# Altium PCB MAGIsDebugger-JLink.PcbDoc
Units mil, origin at the board's own origin, x right, y up, seen from the top; angles counter-clockwise.
Board outline 6000 x 4000 mil, 2 copper layers (Top Layer, Bottom Layer); 33 components, 29 nets, 171 pads, 36 vias.
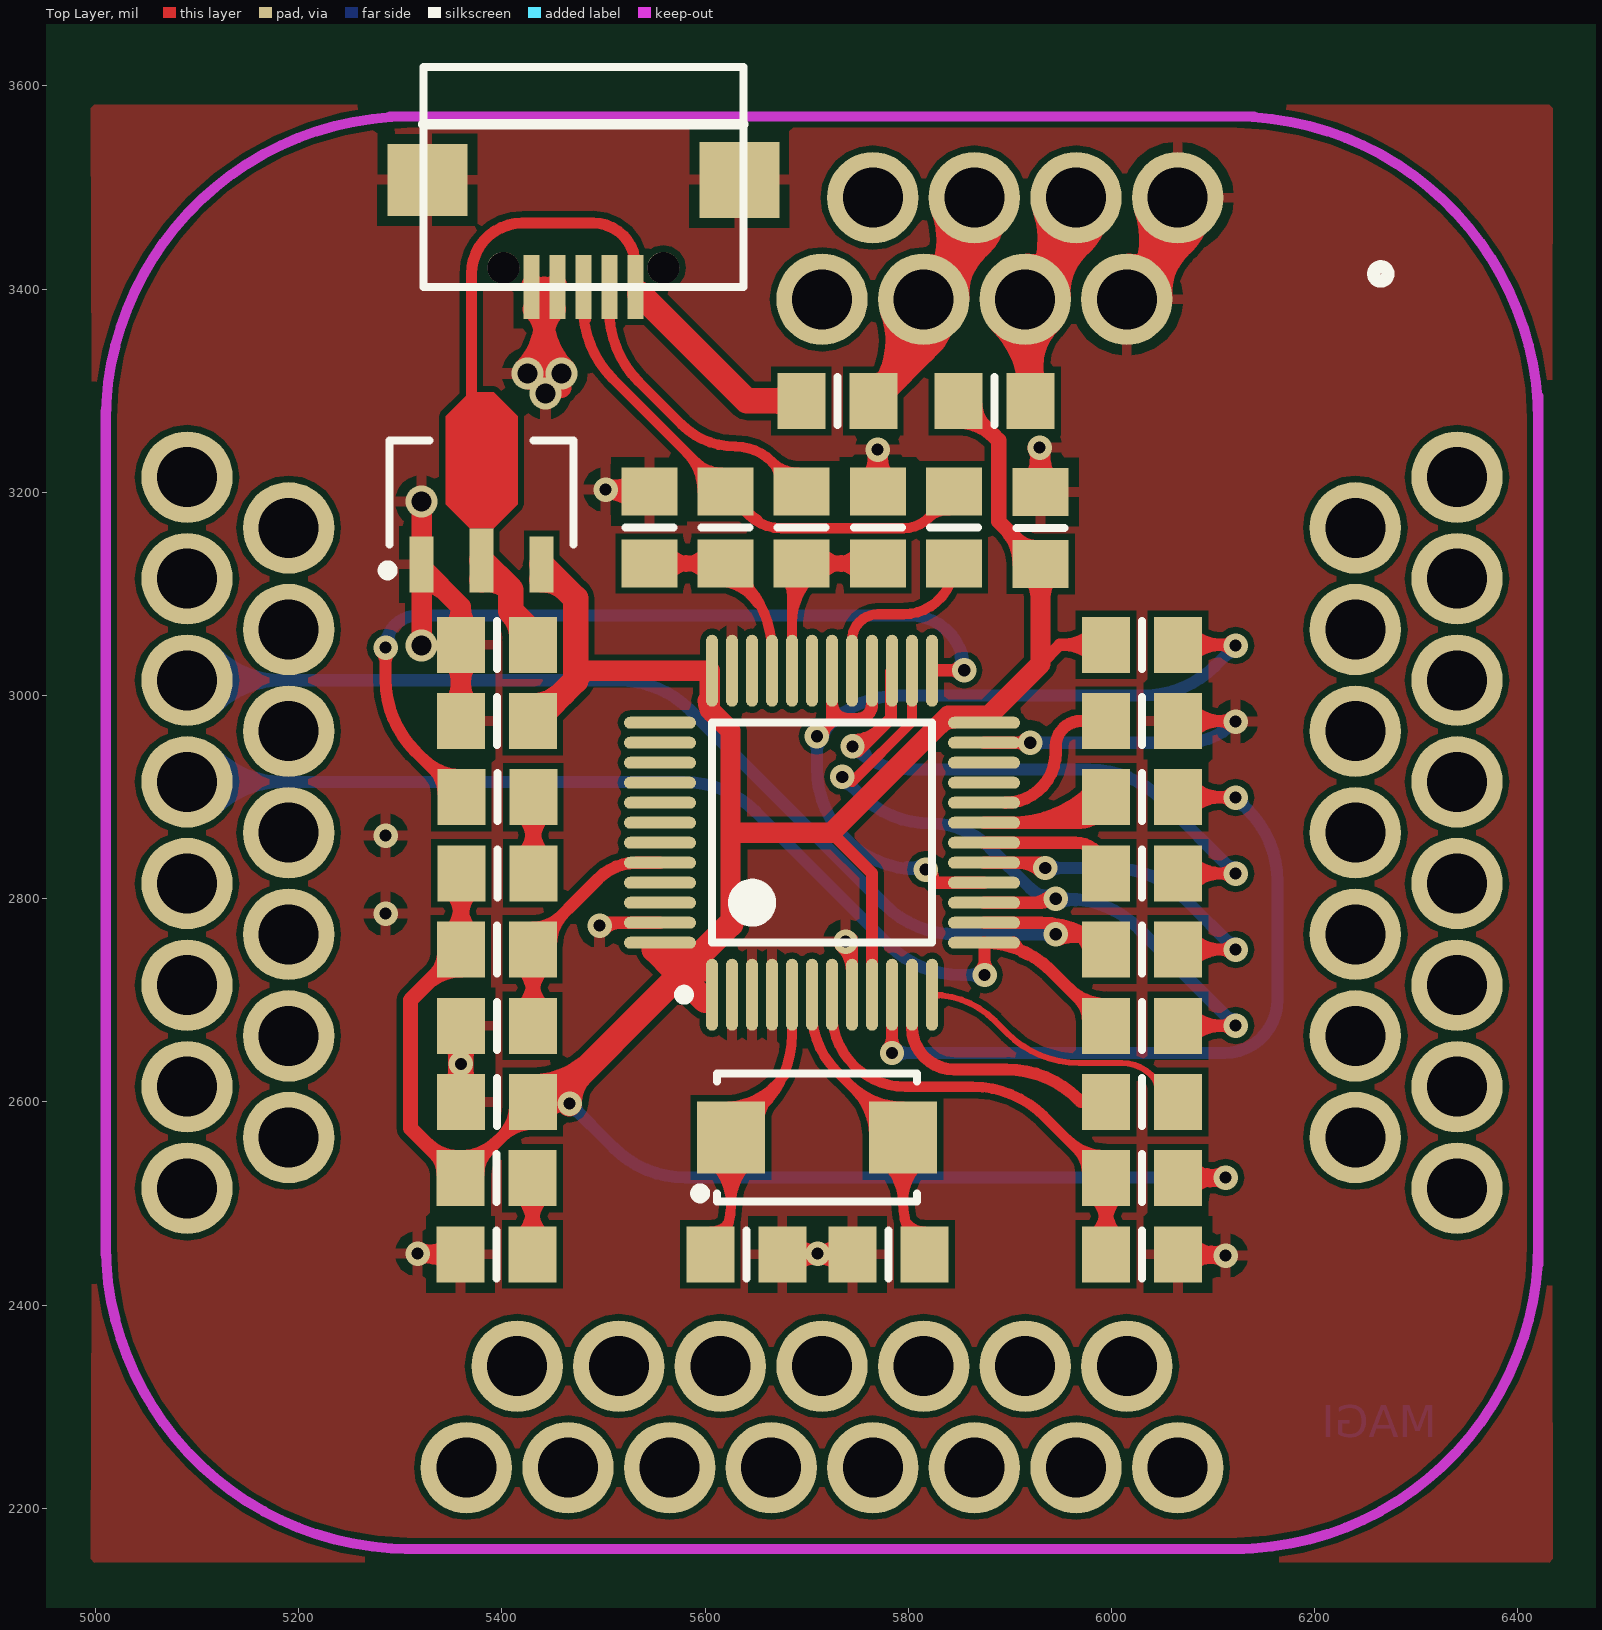
[diagram p0: Top Layer view]
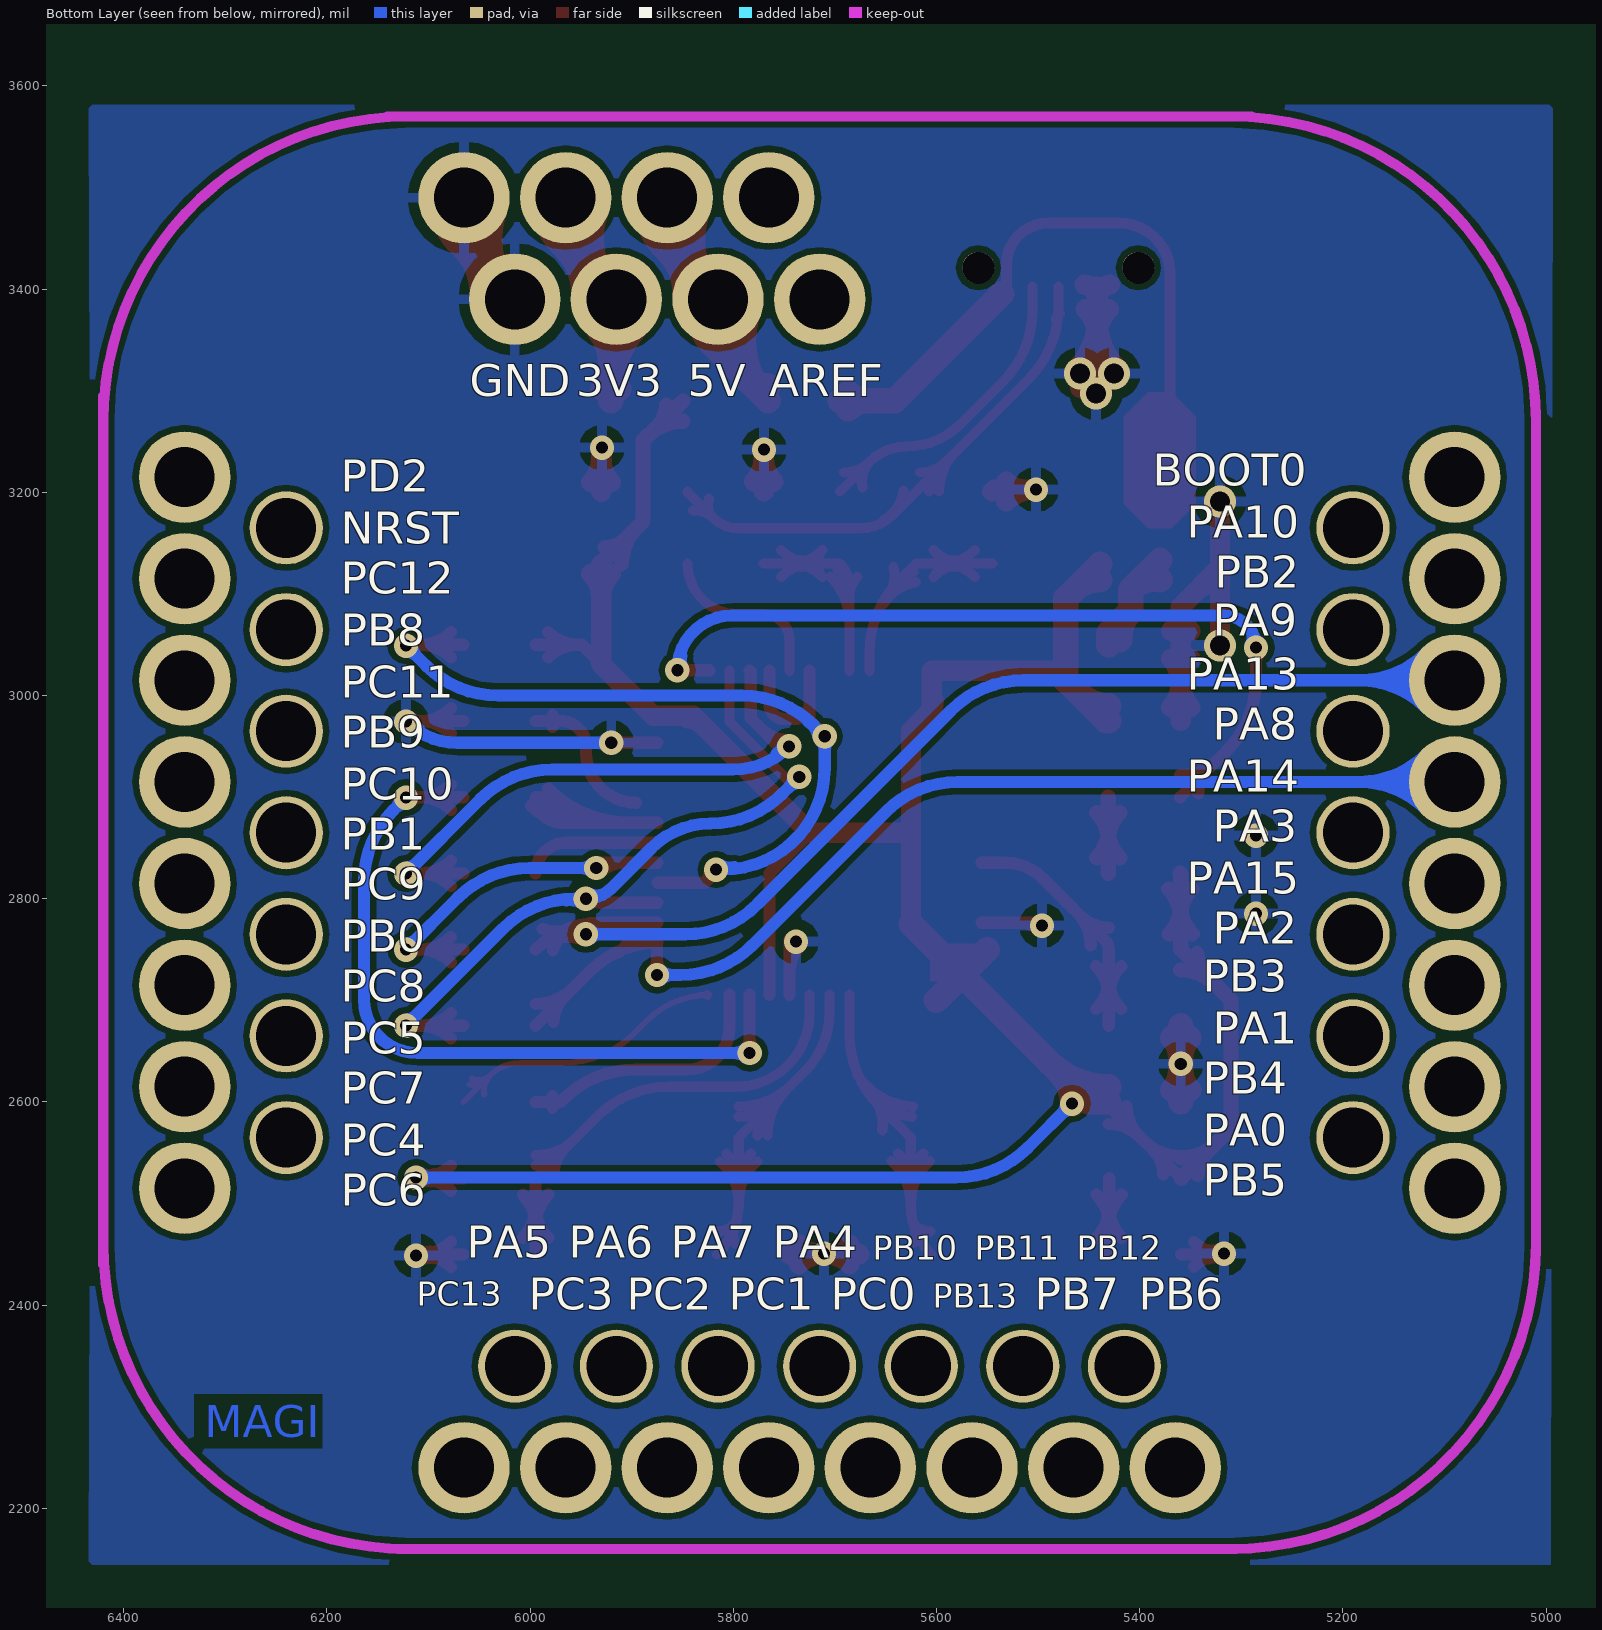
[diagram p1: Bottom Layer view, seen from below]

## Layer stack, top to bottom
Top Solder: solder mask 0.4, Solder Resist, Dk 3.5
Top Layer: signal copper 1.4
Dielectric 1: dielectric 12.6, FR-4, Dk 4.8
Bottom Layer: signal copper 1.4
Bottom Solder: solder mask 0.4, Solder Resist, Dk 3.5

## Board outline
1000,1000 7000,1000 7000,5000 1000,5000

## Design rules (kind name [scope] priority, off if disabled: settings)
Clearance [All] p1: gap=6
PolygonConnect [All] p1: connectstyle=Relief reliefconductorwidth=10 reliefentries=4 polygonreliefangle="90 Angle" airgapwidth=10
RoutingVias [All] p1: holewidth=28 width=50 viastyle="Through Hole" minholewidth=28 minwidth=50 maxholewidth=28 maxwidth=50
SolderMaskExpansion [All] p1: expansion=4
Width [All] p1: maxlimit=100 minlimit=6 preferedwidth=20
29 further rules are at their usual default settings.

## Components (designator, comment, footprint, x,y, rotation, side; value= is the part's Value field where it differs from the comment)
C1 "10uf" 6-0805_n 5395,3050 r180 top
C2 "15PF" 6-0805_n 5770,3165.43 r270 top
C3 "15PF" 6-0805_n 5545,3165.43 r270 top
C4 "10uf" 6-0805_n 5395,2975 r180 top
C5 "10uf" 6-0805_n 5930,3165 r90 top
C6 "10uf" 6-0805_N 5395,2600 r180 top
C7 "15PF" 6-0805_n 5640.43,2450 r180 top
C8 "15PF" 6-0805_n 5780.43,2450 r0 top
C9 "104" 6-0805_n 6030,2450 r180 top
J1 "MAGIsBoard-2x" MAGIsBoard-2x 5715,2865 r0 top
LED1 "LED_3" 6-0805_n 5395.43,2825 r0 top
LED2 "LED_3" 6-0805_n 5394.57,2450 r180 top
R1 "100" 6-0805_N 6030,2900 r0 top
R2 "100" 6-0805_N 6030,2825 r0 top
R3 "100" 6-0805_N 6030,2750 r0 top
R4 "100" 6-0805_N 6030,2675 r0 top
R5 "10K" 6-0805_n 5845,3165.43 r270 top
R6 "100" 6-0805_N 6030,2600 r180 top
R7 "10K" 6-0805_n 5695,3165.43 r270 top
R8 "10K" 6-0805_n 5620,3165.43 r270 top
R9 "10k" 6-0805_N 6030,3050 r180 top
R10 "0" 6-0805_n 5730,3290 r0 top
R11 "0" 6-0805_n 5885,3290 r0 top
R12 "10K" 6-0805_n 6030,2525 r0 top
R13 "10K" 6-0805_n 5395,2750 r180 top
R14 "10K" 6-0805_n 5395,2675 r0 top
R15 "10K" 6-0805_n 6030,2975 r180 top
R16 "RES1_1" 6-0805_n 5395.43,2900 r180 top
R17 "RES1_1" 6-0805_n 5394.57,2525 r180 top
U1 "USB" microUSB 5480,3425 r0 top
U2 "STM32F103CBT6" LQFP48_N 5715,2865 r90 top
U3 "HS7333" HS7333 5380,3200 r90 top
X1 "8M" 5032 5720,2565 r270 top

## Footprints (in the part's own frame and the unit in brackets; to place one, negate y for a bottom-side part, rotate by r counter-clockwise, add the part's x,y. Pads: shape width x height; smd on the part's side, far side on the other; paste and mask are expansions set on the pad)
6-0805_n [mm] "Chip Resistor, Body 2.0x1.2mm, IPC Medium Density"
  rect 1.2x1.4 smd: 1(-0.9,0) 2(0.9,0)
  silkscreen extent 0,-0.6 0,0.6, body extent -1.07,-0.7 1.07,0.7, height 0.7
6-0805_N [mm] "Chip Resistor, Body 2.0x1.2mm, IPC Medium Density"
  rect 1.2x1.4 smd: 1(-0.9,0) 2(0.9,0)
  silkscreen extent 0,-0.6 0,0.6, body extent -1.07,-0.7 1.07,0.7, height 0.7
5032 [mm]
  rect 1.8x1.7 smd: 1(0,-2.404) 2(0,1.896)
  silkscreen extent -1.6,-3.3 1.6,2.25
HS7333 [mm] "SOT89, 3-Leads, Body 4.50x2.50mm, Pitch 1.50mm, Lead Span 4.1mm, IPC Medium Density"
  rect 1.4x0.6 smd: 1(-1.8,1.5) 3(-1.8,-1.5)
  rect 1.6x0.6 smd: 2(-1.7,0)
  Top Layer region: -0.9,0.3 -0.3,0.9 1.9,0.9 2.5,0.3 2.5,-0.3 1.9,-0.9 -0.3,-0.9 -0.9,-0.3
  silkscreen extent -2.07,-2.3 1.3,2.47, body extent -1.3,-2.3 1.3,2.3, height 1.6
LQFP48_N [mm] "Thin QFP, 48-Leads, Body 7x7mm, Pitch 0.5mm, IPC Medium Density"
  oval 1.8x0.3 smd: 1(-4.05,2.75) 2(-4.05,2.25) 3(-4.05,1.75) 4(-4.05,1.25) 5(-4.05,0.75) 6(-4.05,0.25) 7(-4.05,-0.25) 8(-4.05,-0.75) 9(-4.05,-1.25) 10(-4.05,-1.75) 11(-4.05,-2.25) 12(-4.05,-2.75) 25(4.05,-2.75) 26(4.05,-2.25) 27(4.05,-1.75) 28(4.05,-1.25) 29(4.05,-0.75) 30(4.05,-0.25) 31(4.05,0.25) 32(4.05,0.75) 33(4.05,1.25) 34(4.05,1.75) 35(4.05,2.25) 36(4.05,2.75)
  oval 0.3x1.8 smd: 13(-2.75,-4.05) 14(-2.25,-4.05) 15(-1.75,-4.05) 16(-1.25,-4.05) 17(-0.75,-4.05) 18(-0.25,-4.05) 19(0.25,-4.05) 20(0.75,-4.05) 21(1.25,-4.05) 22(1.75,-4.05) 23(2.25,-4.05) 24(2.75,-4.05) 37(2.75,4.05) 38(2.25,4.05) 39(1.75,4.05) 40(1.25,4.05) 41(0.75,4.05) 42(0.25,4.05) 43(-0.25,4.05) 44(-0.75,4.05) 45(-1.25,4.05) 46(-1.75,4.05) 47(-2.25,4.05) 48(-2.75,4.05)
  silkscreen extent -4.17,-2.75 2.75,3.57, body extent -3.5,-3.5 3.5,3.5, height 1.6
MAGIsBoard-2x [mil]
  round 90 hole 59.06: 1(300,525) 1(350,625) 2(200,525) 2(250,625) 3(100,525) 3(150,625) 4(0,525) 4(50,625) 29(-625,350) 30(-625,250) 31(-625,150) 32(-625,50) 33(-625,-50) 34(-625,-150) 35(-625,-250) 36(-625,-350) 37(-350,-625) 38(-250,-625) 39(-150,-625) 40(-50,-625) 41(50,-625) 42(150,-625) 43(250,-625) 44(350,-625) 45(625,-350) 46(625,-250) 47(625,-150) 48(625,-50) 49(625,50) 50(625,150) 51(625,250) 52(625,350)
  round 90 / inner round 72 / far side round 72 hole 59.06: 8(-525,300) 9(-525,200) 10(-525,100) 11(-525,0) 12(-525,-100) 13(-525,-200) 14(-525,-300) 15(-300,-525) 16(-200,-525) 17(-100,-525) 18(0,-525) 19(100,-525) 20(200,-525) 21(300,-525) 22(525,-300) 23(525,-200) 24(525,-100) 25(525,0) 26(525,100) 27(525,200) 28(525,300)
  Keep-Out Layer lines w10: -705,-415 -705,415 ; -705,-405 ccw(c-405,-405) -405,-705 ; -705,405 cw(c-405,405) -405,705 ; -425,705 425,705 ; -410,-705 415,-705 ; 405,-705 ccw(c405,-405) 705,-405 ; 405,705 cw(c405,405) 705,405 ; 705,-425 705,430
  silkscreen extent 543,543 557,557
microUSB [mm]
  round 0.8 hole 0.8: 0(-2,-0.1) 0(2,-0.1)
  rect 0.4x1.6 smd: 1(1.3,-0.576) 2(0.65,-0.576) 3(0,-0.576) 4(-0.65,-0.576) 5(-1.3,-0.576)
  rect 2x1.8 smd: 6(-3.9,2.1)
  rect 2x1.9 smd: 7(3.9,2.1)
  silkscreen extent -4,-0.58 4,4.92, body extent -4.1,-0.68 4.1,5.02, height 3

## Part data
C1 C4 C5 C6: library part "CAPACITOR POL", "Capacitor"
C2 C3 C7 C8 C9: library part CAP
R1 R2 R3 R4 R6 R9: library part RESISTOR/SM
R5 R7 R8 R10 R11 R12 R13 R14 R15: library part RES
U2: "STM32 ARM-based 32-bit MCU with 128 Kbytes Flash, 48-pin LQFP, Industrial Temperature"
X1: library part CRYSTAL

## Via types
v1: diameter 24, hole 12, Top Layer to Bottom Layer, 31 vias
v2: diameter 31.5, hole 19.68, Top Layer to Bottom Layer, 5 vias

## Nets (pads, with @x,y where several pads share a name; then routed paths per layer and width w, separated by ;. In a path a pad name is that pad's centre, name@x,y a point inside that pad or via, vN(x,y) a via of type N, cw(c..) or ccw(c..) an arc to the next point about the centre after c; other vN are vias at no path point)
3.3V: C4.1 C5.1 C6.1 LED1.1 R9.2 R11.1 R12.2 R13.2 R17.2 U2.1 U2.9 U2.24 U2.36 U2.48 U3.3 | length 3993.6
  Top Layer w12: R17.2 5427.82,2593.68 ccw(c5421.5,2600) C6.1 ; R17.2@5359.13,2546.56 ccw(c5359.13,2598.61) 5395.94,2561.8 ; R17.2@5376.76,2528.94 cw(c5409.79,2528.94) 5386.43,2552.3 ; 5399.95,2565.81 cw(c5430.43,2535.33) C6.1@5430.43,2578.44 ; 5400.52,2566.38 ccw(c5370.84,2596.06) C6.1@5412.81,2596.06 ; 5724.33,2865 5764.21,2825.11 U2.9 ; 5930,3031.04 5948.96,3050 R9.2 ; R9.2@5982.11,3037.54 ccw(c5952.02,3007.46) 5952.02,3050 ccw(c5952.02,3092.54) R9.2@5982.11,3062.46 ; R12.2 v1@6114.17,2525 ; R12.2@6077.89,2512.54 cw(c6107.98,2482.46) 6107.98,2525 cw(c6107.98,2567.54) R12.2@6077.89,2537.46 ; 6093.9,2528.77 ccw(c6099.12,2548.25) v1@6109.2,2530.79 ; 6096.29,2525 ccw(c6096.29,2541.5) v1@6107.96,2529.83 ; 6096.86,2522.02 cw(c6101.07,2506.3) v1@6109.2,2520.39 ; 6099.15,2525 cw(c6099.15,2512.53) v1@6107.96,2521.35 ; 6099.3,2522.68 ccw(c6096.01,2534.94) v1@6107.01,2528.59
  Top Layer w15: 5324.89,2559.24 ccw(c5359.13,2593.49) R17.2@5359.13,2545.06 ; 5325.32,2715.76 cw(c5359.57,2681.51) R13.2@5359.57,2729.94 ; 5334.4,2549.74 cw(c5313.59,2528.94) R17.2@5343.01,2528.94 ; 5334.83,2725.26 ccw(c5314.03,2746.06) R13.2@5343.44,2746.06 ; R13.2@5348.17,2765.34 ccw(c5320.64,2792.86) 5359.57,2792.86 ccw(c5398.49,2792.86) R13.2@5370.97,2765.34 ; LED1.1@5348.6,2809.66 cw(c5322.12,2783.19) 5359.57,2783.19 ; R17.2 5310,2574.13 5310,2700.43 R13.2 5359.57,2824.57 LED1.1 ; 5359.57,2781.1 cw(c5399.97,2781.1) LED1.1@5371.4,2809.66 ; R11.1@5849.57,3269.94 cw(c5849.57,3221.51) 5883.81,3255.76 ; R11.1 5887.6,3251.97 5887.8,3251.97 ; R11.1@5865.69,3286.06 ccw(c5895.11,3286.06) 5874.31,3265.26 ; 5883.31,3256.85 5888.94,3251.22 5888.94,3171.22 5930,3130.16 C5.1 ; 5895.34,3164.82 cw(c5860.08,3129.57) C5.1@5909.94,3129.57 ; 5906.27,3153.89 ccw(c5926.06,3173.67) C5.1@5926.06,3145.69
  Top Layer w20: 5472.56,3014.78 5482.23,3024.45 5604.51,3024.45 5604.51,2985.85 5625,2965.36 5625,2865 ; U2.36@5602.64,2994.92 ccw(c5620.02,2994.92) 5607.73,2982.63 ; 5625,2775 5625,2865 ; 5830.87,2971.54 cw(c5844.92,2957.48) U2.24@5844.92,2977.36 ; C5.1@5920.37,3119.93 cw(c5897.11,3096.68) 5930,3096.68 cw(c5962.89,3096.68) C5.1@5939.63,3119.93 ; C5.1 5930,3031.04 5878.96,2980 5839.33,2980 5724.33,2865 5625,2865
  Top Layer w25: C6.1 5450,2600 5570,2720 ; C6.1@5430.43,2615.06 ccw(c5430.43,2698.65) 5489.54,2639.54 ; C4.1 5432.78,2975 5472.56,3014.78 5472.56,3095.63 U3.3 ; C4.1@5430.43,2990.06 ccw(c5430.43,3032.07) 5460.14,3002.36 ; U3.3@5439.06,3114.07 cw(c5439.06,3077.72) 5464.76,3103.43 ; v1@5466.04,2598.43 cw(c5508.55,2598.43) 5478.49,2628.49 ; 5550,2750 5570,2730 5570,2720 ; 5600,2700 5580,2720 5570,2720 ; 5625,2775 5570,2720
  Bottom Layer w12: v1@5466.54,2592.43 cw(c5466.54,2577.94) 5476.78,2588.18 cw(c5487.02,2598.43) v1@5472.54,2598.43 ; v1(5466.54,2598.43) 5510.08,2554.88 ccw(c5580.79,2625.59) 5580.79,2525.59 v1(6112.2,2525.59) ; v1@6107.96,2521.35 ccw(c6097.72,2511.11) 6097.72,2525.59 ccw(c6097.72,2540.08) v1@6107.96,2529.83
5V: C1.1 R10.1 U1.1 U3.2 | length 837.2
  Top Layer w11: 5380,3230 cw(c5380,3240) 5370,3240 5370,3415 cw(c5420,3415) 5420,3465 5490,3465 cw(c5490,3423.82) 5531.18,3423.82 U1.1
  Top Layer w25: U3.2@5379.91,3114.07 cw(c5384.49,3080.07) 5408.74,3104.33 ; U3.2 5408.74,3104.33 ; C1.1@5419.34,3054.72 ccw(c5382.95,3057.28) 5408.75,3083.07 ; C1.1 5430.43,3061.39 5408.74,3083.07 ; U1.1@5535.43,3395.67 5641.1,3290 R10.1 ; R10.1@5686.7,3282.14 ccw(c5667.72,3263.15) 5667.72,3290 ccw(c5667.72,3316.85) R10.1@5686.7,3297.86 ; 5408.74,3083.07 5408.74,3104.33
BOOT0: R13.1 R14.2 U2.44 | length 436.3
  Top Layer w12: R14.2@5417.97,2691.4 ccw(c5387.89,2721.48) 5430.43,2721.48 ccw(c5472.98,2721.48) R14.2@5442.89,2691.4 ; R13.1@5417.97,2733.6 cw(c5387.89,2703.52) 5430.43,2703.52 cw(c5472.98,2703.52) R13.1@5442.89,2733.6 ; R14.2 R13.1 cw(c5443.55,2750) 5434.27,2759.27 5495,2820 cw(c5532.35,2782.65) 5532.35,2835.47 U2.44 ; R13.1@5430.43,2771.56 ccw(c5430.43,2810.49) 5457.96,2782.96 ; R13.1@5448.06,2753.94 cw(c5494.21,2753.94) 5461.57,2786.57
BOOT1: R15.2 U2.20 | length 168.2
  Top Layer w12: U2.20@5895.58,2894.53 ccw(c5895.58,2943.95) 5945,2943.95 5945,2950 cw(c5970,2950) 5970,2975 ; R15.2@5977.87,2969.35 ccw(c5970,2966.69) 5970,2975 ; R15.2@5977.87,2980.65 cw(c5970,2983.31) 5970,2975 ; R15.2 5970,2975
GND: C1.2 C2.1 C3.1 C4.2 C5.2 C6.2 C7.1 C8.1 C9.1 J1.1 LED2.2 R14.1 R15.1 U1.4 U1.5 U1.6 U1.7 U2.2 U2.3 U2.4 U2.8 U2.23 U2.35 U2.47 U3.1 | length 3040.7
  Top Layer w12: v1(5316.93,2450.79) v1@5317.72,2450 ; v1@5319.93,2445.59 cw(c5326.22,2434.69) 5329.48,2446.85 ; v1@5319.93,2455.98 ccw(c5328.82,2471.38) 5333.42,2454.21 ; v1@5321.17,2446.54 cw(c5329.51,2438.2) 5329.51,2450 ; v1@5321.17,2455.03 ccw(c5333.32,2467.17) 5333.32,2450 ; v1@5322.13,2447.79 cw(c5331.82,2442.19) 5328.92,2453 ; v1@5322.13,2453.79 ccw(c5336.31,2461.98) 5332.07,2446.15 ; LED2.2@5346.44,2437.78 ccw(c5317.72,2410.14) v1@5317.72,2450 ; LED2.2@5346.44,2462.22 cw(c5317.72,2489.86) v1@5317.72,2450 ; LED2.2 v1@5317.72,2450 ; v1@5495,2775 5496.42,2776.42 U2.47 ; v1@5500.31,2769.38 cw(c5517.3,2752.39) 5517.3,2776.42 ; v1@5733.95,2753.63 cw(c5708.4,2728.09) U2.8@5744.53,2728.09 ; U2.8 v1@5744.53,2760.47 ; U2.23 v1(5920,2953.58) 5923.58,2953.58 v1@5925,2955 ; v1@5915.76,2949.34 ccw(c5905.51,2939.1) 5905.51,2953.58 ccw(c5905.51,2968.07) v1@5915.76,2957.83 ; C9.1 v1@6112.2,2450 ; R15.1 v1@6115,2975 ; C9.1@6077.89,2437.54 cw(c6107.98,2407.46) 6107.98,2450 cw(c6107.98,2492.54) C9.1@6077.89,2462.46 ; R15.1@6077.89,2962.54 cw(c6107.98,2932.46) 6107.98,2975 cw(c6107.98,3017.54) R15.1@6077.89,2987.46 ; 6092.42,2445.83 cw(c6098.15,2424.47) v1@6109.2,2443.62 ; 6094.87,2450 cw(c6094.87,2431.48) v1@6107.96,2444.58 ; 6098.12,2452.64 cw(c6094.33,2438.5) v1@6107.01,2445.82 ; 6098.33,2452.58 ccw(c6102.04,2466.42) v1@6109.2,2454.02 ; 6106.14,2975 cw(c6106.14,2958.5) v1@6117.8,2970.17 ; 6108.99,2975 ccw(c6108.99,2987.47) v1@6117.8,2978.65
  Top Layer w20: v2@5318.9,3047.24 v2(5320.94,3049.29) U3.1@5320.94,3126.19 ; v2(5320.87,3190.94) v2(5320.87,3190.94) U3.1 U3.1@5320.94,3126.19 ; U3.1@5320.94,3111.57 cw(c5320.94,3076.29) 5345.9,3101.24 ; C4.2@5349.93,2988.57 ccw(c5326.68,3011.82) 5359.57,3011.82 ccw(c5392.45,3011.82) C4.2@5369.2,2988.57 ; C1.2@5349.93,3036.43 cw(c5326.68,3013.18) 5359.57,3013.18 cw(c5392.45,3013.18) C1.2@5369.2,3036.43 ; C1.2@5349.93,3063.57 ccw(c5326.68,3086.82) 5359.57,3086.82 ccw(c5392.45,3086.82) C1.2@5369.2,3063.57 ; C4.2 C1.2 5359.57,3087.57 U3.1@5320.94,3126.19 ; v2@5421.13,3320.99 ccw(c5371.68,3370.44) 5441.61,3370.44 ; v2@5426.54,3311.34 cw(c5431.38,3291.2) v2@5449.32,3301.56 ; U1.5@5429.2,3404.43 cw(c5426.48,3389.55) 5441.61,3389.55 cw(c5456.75,3389.55) U1.4@5454.03,3404.43 ; U1.5@5430.32,3380.22 cw(c5403.06,3352.96) 5441.61,3352.96 cw(c5480.17,3352.96) U1.4@5452.91,3380.22 ; v2@5435.27,3306.85 ccw(c5419.97,3322.16) 5441.61,3322.16 ; v2@5440.66,3316.56 ccw(c5458.75,3321.4) v2@5458.38,3302.68 ; 5441.05,3316.35 ccw(c5458.88,3321.13) v2@5457.91,3302.7 ; 5441.61,3314.26 ccw(c5459.93,3314.26) v2@5446.98,3301.31 ; 5441.61,3323.68 ccw(c5465.41,3323.68) v2@5448.58,3306.85 ; 5441.61,3371.96 ccw(c5513.69,3371.96) v2@5462.73,3320.99 ; 5441.61,3402.34 5441.61,3312.99 ccw(c5456.98,3312.99) v2@5446.74,3301.53 ; v1(5501.97,3202.76) 5543.11,3202.76 C3.1 ; v1@5503.61,3202.76 cw(c5503.61,3163.42) C3.1@5531.43,3191.23 ; v1@5512.74,3202.76 ccw(c5512.74,3229.19) C3.1@5531.43,3210.5 ; C7.1 C8.1 ; C7.1@5685.5,2440.37 cw(c5708.75,2417.11) 5708.75,2450 cw(c5708.75,2482.89) C7.1@5685.5,2459.63 ; C8.1@5735.37,2440.37 ccw(c5712.11,2417.11) 5712.11,2450 ccw(c5712.11,2482.89) C8.1@5735.37,2459.63 ; C2.1@5760.37,3210.5 ccw(c5737.11,3233.75) 5770,3233.75 ccw(c5802.89,3233.75) C2.1@5779.63,3210.5 ; v1(5769.69,3242.13) 5770,3241.81 C2.1 ; C5.2@5920.37,3210.07 ccw(c5897.11,3233.32) 5930,3233.32 ccw(c5962.89,3233.32) C5.2@5939.63,3210.07 ; v1@5927.17,3244.09 5930,3241.26 C5.2 ; v1@5927.4,3243.09 cw(c5912.5,3234.49) 5929.12,3230.04
  Top Layer w25: C6.2@5351.7,2611.8 ccw(c5332.72,2630.79) 5359.57,2630.79 ccw(c5386.42,2630.79) C6.2@5367.43,2611.8 ; R14.1@5351.7,2663.2 cw(c5332.72,2644.21) 5359.57,2644.21 cw(c5386.42,2644.21) R14.1@5367.43,2663.2 ; C6.2 R14.1 ; J1.1@6017.48,3422.41 ccw(c6022.1,3482.89) 6065,3440 ; J1.1@6034.5,3478.77 cw(c5955.38,3449.62) 6015,3390 6065,3440 ; J1.1@6042.63,3417.63 ccw(c5995.77,3464.5) J1.1@6057.96,3487.41 ; J1.1@6047.41,3392.48 cw(c6107.89,3397.1) 6065,3440 ; J1.1@6051.81,3460.3 cw(c6042.79,3440) 6065,3440 ; J1.1@6065,3490 6065,3440 ; 6070.27,3445.27 ccw(c6036.16,3479.38) J1.1@6081.42,3496.05 ; J1.1@6078.19,3460.3 ccw(c6087.21,3440) 6065,3440
  Bottom Layer w12: v1(5920,2953.58) 6071.77,2953.58 ccw(c6071.77,3024.69) v1(6122.05,2974.41) ; v1@5924.24,2949.34 cw(c5934.49,2939.1) 5934.49,2953.58 cw(c5934.49,2968.07) v1@5924.24,2957.83 ; v1@6116.25,2975.96 cw(c6102.26,2979.71) 6109.5,2967.17 cw(c6116.75,2954.62) v1@6120.49,2968.61
  other v1: 6112.2,2448.82 5710.63,2450.79 5359.57,2637.5 5738.19,2757.87 5496.06,2773.62 5285.43,2785.43 5285.43,2862.2 5929.13,3244.09
  other v2: 5442.91,3297.24 5425.2,3316.93 5458.66,3316.93
LED: R16.2 U2.25 | length 983.5
  Top Layer w12: v1@5281.18,3043 cw(c5270.94,3032.75) 5285.42,3032.75 cw(c5299.91,3032.75) v1@5289.67,3043 ; v1@5287.09,3047.24 v1(5285.42,3047.24) 5285.42,3016 ccw(c5385.42,3016) 5314.71,2945.29 R16.2 ; 5323.2,2936.8 ccw(c5360,2973.61) R16.2@5360,2921.56 ; 5332.7,2927.3 cw(c5309.34,2903.94) R16.2@5342.38,2903.94 ; U2.25 5823.82,3025 v1(5855,3025) ; v1@5850.76,3020.76 ccw(c5840.51,3010.51) 5840.51,3025 ccw(c5840.51,3039.49) v1@5850.76,3029.24
  Bottom Layer w12: v1@5282.42,3052.43 ccw(c5275.18,3064.98) 5289.17,3061.23 ccw(c5303.16,3057.48) v1@5290.62,3050.24 ; v1(5285.42,3047.24) cw(c5316.92,3047.24) 5316.92,3078.74 5801.26,3078.74 cw(c5801.26,3025) v1(5855,3025) ; v1@5849.8,3028 ccw(c5837.26,3035.24) 5851.25,3038.99 ccw(c5865.24,3042.74) v1@5858,3030.2
NetC2_2: C2.2 R7.2 U2.32 | length 511
  Top Layer w10: R7.2@5677.9,3116.83 cw(c5659.6,3098.54) 5685.47,3098.54 ; U2.32 5685.47,3107 cw(c5718,3107) R7.2 C2.2 ; 5685.47,3071.55 cw(c5749.52,3071.55) R7.2@5704.23,3116.83 ; 5685.47,3095.69 cw(c5725.38,3095.69) R7.2@5697.16,3123.9 ; R7.2@5712.1,3116.83 cw(c5743.89,3085.04) 5743.89,3130 cw(c5743.89,3174.96) R7.2@5712.1,3143.17 ; R7.2@5714.2,3119.34 cw(c5729.24,3108.84) 5733.98,3126.55 ; R7.2@5714.2,3140.66 ccw(c5729.24,3151.16) 5733.98,3133.45 ; R7.2@5715.06,3120.69 cw(c5737.03,3108.01) 5730.47,3132.51 ; R7.2@5715.06,3139.31 ccw(c5737.03,3151.99) 5730.47,3127.49 ; C2.2@5752.9,3116.83 ccw(c5721.11,3085.04) 5721.11,3130 ccw(c5721.11,3174.96) C2.2@5752.9,3143.17
NetC3_2: C3.2 R8.2 U2.33 | length 511.7
  Top Layer w10: C3.2 R8.2 5636.5,3113.5 cw(c5565.79,3042.79) 5665.79,3042.79 U2.33 ; C3.2@5562.1,3116.83 cw(c5593.89,3085.04) 5593.89,3130 cw(c5593.89,3174.96) C3.2@5562.1,3143.17 ; 5581.02,3126.55 cw(c5585.76,3108.84) R8.2@5600.8,3119.34 ; 5581.02,3133.45 ccw(c5585.76,3151.16) R8.2@5600.8,3140.66 ; 5584.53,3127.49 ccw(c5577.97,3151.99) R8.2@5599.94,3139.31 ; 5584.53,3132.51 cw(c5577.97,3108.01) R8.2@5599.94,3120.69 ; R8.2@5602.9,3116.83 ccw(c5571.11,3085.04) 5571.11,3130 ccw(c5571.11,3174.96) R8.2@5602.9,3143.17 ; R8.2@5620.25,3111.75 cw(c5610.43,3063.19) 5651.71,3090.58 ; R8.2@5622.23,3121.55 cw(c5617.2,3096.65) R8.2@5638.36,3110.7 ; R8.2@5642.19,3126.31 ccw(c5681.76,3118.31) 5648.13,3095.98
NetJ1_2: J1.2 R11.2 | length 770.5
  Top Layer w25: J1.2@5892.02,3367.02 cw(c5823.42,3298.42) R11.2@5920.43,3298.42 ; R11.2@5912.57,3301.8 ccw(c5893.58,3320.79) 5920.43,3320.79 ccw(c5947.28,3320.79) R11.2@5928.3,3301.8 ; J1.2@5917.48,3422.41 ccw(c5922.1,3482.89) 5965,3440 ; R11.2 5920.43,3384.57 J1.2@5915,3390 ; 5920.43,3324.65 cw(c5980.35,3324.65) J1.2@5937.98,3367.02 ; J1.2@5934.5,3478.77 cw(c5855.38,3449.62) J1.2@5915,3390 ; J1.2@5942.63,3417.63 ccw(c5895.77,3464.5) J1.2@5957.96,3487.41 ; J1.2@5947.41,3392.48 cw(c6007.89,3397.1) 5965,3440 ; J1.2@5951.81,3460.3 cw(c5942.79,3440) 5965,3440 ; J1.2@5965,3490 5965,3440 ; 5970.27,3445.27 ccw(c5936.16,3479.38) J1.2@5981.42,3496.05 ; J1.2@5978.19,3460.3 ccw(c5987.21,3440) 5965,3440 ; J1.2@5915,3390 5965,3440
NetJ1_3: J1.3 R10.2 | length 941
  Top Layer w25: R10.2@5765.43,3305.06 ccw(c5765.43,3341.41) 5791.14,3315.71 ; J1.3@5784.58,3378.56 cw(c5706.31,3349.13) R10.2 5814.96,3339.53 ; 5792.86,3317.43 ccw(c5746.17,3364.12) J1.3@5807.98,3387.36 ; J1.3@5801.52,3360.43 cw(c5791.99,3339.53) 5814.96,3339.53 ; J1.3@5819.18,3422.23 ccw(c5826.23,3476.6) 5865,3437.83 ; 5820.29,3344.86 ccw(c5786.04,3379.11) J1.3@5831.38,3396.16 ; J1.3@5828.42,3360.4 ccw(c5837.87,3339.53) 5814.96,3339.53 ; J1.3@5834.58,3478.56 cw(c5754.37,3448.4) J1.3@5814.96,3387.8 ; J1.3@5842.39,3415.22 ccw(c5794.23,3463.39) J1.3@5857.98,3487.36 ; J1.3@5847.45,3391.83 cw(c5907.6,3395.23) 5865,3437.83 ; J1.3@5850.68,3460.83 cw(c5839.39,3437.84) 5865,3437.84 ; J1.3@5865,3490 5865,3437.83 ; 5869.82,3442.65 ccw(c5834.09,3478.38) J1.3@5881.38,3496.16 ; J1.3@5879.32,3460.83 ccw(c5890.61,3437.84) 5865,3437.84 ; 5814.96,3339.53 J1.3@5814.96,3387.8 ; J1.3@5814.96,3387.8 5865,3437.83
NetLED1_2: LED1.2 R16.1 | length 197.3
  Top Layer w15: LED1.2@5419.47,2840.34 ccw(c5391.94,2867.86) 5430.87,2867.86 ccw(c5469.79,2867.86) LED1.2@5442.27,2840.34 ; R16.1@5419.47,2884.66 cw(c5391.94,2857.14) 5430.87,2857.14 cw(c5469.79,2857.14) R16.1@5442.27,2884.66 ; LED1.2 R16.1
NetLED2_1: LED2.1 R17.1 | length 208.7
  Top Layer w12: LED2.1@5417.54,2466.4 ccw(c5387.46,2496.48) 5430,2496.48 ccw(c5472.54,2496.48) LED2.1@5442.46,2466.4 ; R17.1@5417.54,2508.6 cw(c5387.46,2478.52) 5430,2478.52 cw(c5472.54,2478.52) R17.1@5442.46,2508.6 ; LED2.1 R17.1
NetR5_2: R5.2 U2.29 | length 173.6
  Top Layer w10: U2.29 5744.53,3054.53 cw(c5770,3054.53) 5770,3080 5795,3080 ccw(c5795,3130) R5.2
NRST: C9.2 R12.1 U2.7 | length 665.2
  Top Layer w10: U2.7 5724.84,2687.55 ccw(c5797.55,2687.55) 5746.14,2636.14 ccw(c5797.17,2687.17) 5797.17,2615 5863.15,2615 cw(c5863.15,2515) 5933.86,2585.71 R12.1 ; 5956.06,2563.51 ccw(c5994.57,2602.02) R12.1@5994.57,2547.56 ; 5965.56,2554.01 cw(c5940.49,2528.94) R12.1@5975.94,2528.94 ; R12.1@5973.13,2546.44 ccw(c5994.57,2567.88) R12.1@5994.57,2537.56
  Top Layer w12: C9.2@5982.11,2466.4 ccw(c5952.02,2496.48) 5994.57,2496.48 ccw(c6037.11,2496.48) C9.2@6007.03,2466.4 ; R12.1@5982.11,2508.6 cw(c5952.02,2478.52) 5994.57,2478.52 cw(c6037.11,2478.52) R12.1@6007.03,2508.6 ; C9.2 R12.1
OSC_IN: C7.2 U2.5 X1.1 | length 627.6
  Top Layer w10: C7.2 ccw(c5555.86,2499.14) 5625.35,2499.14 ; C7.2@5605.93,2472.54 ccw(c5606.88,2491.76) 5623.55,2482.14 ccw(c5644.16,2470.24) C7.2@5622.19,2461.09 ; X1.1@5606.32,2541.87 cw(c5567.89,2499.14) 5625.35,2499.14 ; X1.1@5613.01,2549.3 cw(c5588.08,2521.59) 5625.35,2521.59 cw(c5662.63,2521.59) X1.1@5637.7,2549.3 ; X1.1@5623.32,2595.36 ccw(c5618.12,2667.83) 5677.43,2625.87 ; X1.1@5624.03,2585.39 ccw(c5620.07,2640.55) 5665.22,2608.61 ; X1.1@5644.39,2541.87 ccw(c5682.82,2499.14) 5625.35,2499.14 ; X1.1@5653.41,2571.78 cw(c5692.52,2578.49) 5660.12,2601.4 ; U2.5 5685.47,2666.54 cw(c5585.47,2666.54) 5656.18,2595.83 X1.1 5625.35,2499.14
OSC_OUT: C8.2 U2.6 X1.2 | length 670.1
  Top Layer w10: U2.6 5705.16,2688.41 ccw(c5787.05,2688.41) 5729.14,2630.5 X1.2 5794.65,2501.23 ; 5742.69,2616.95 ccw(c5794.65,2668.9) X1.2@5794.65,2595.43 ; 5747.45,2612.2 cw(c5702.21,2566.97) X1.2@5766.18,2566.97 ; 5759.76,2599.88 ccw(c5794.65,2634.76) X1.2@5794.65,2585.43 ; X1.2@5764.52,2595.13 cw(c5736.36,2566.97) X1.2@5776.18,2566.97 ; X1.2@5776.15,2541.4 cw(c5741.79,2501.23) 5794.65,2501.23 ; X1.2@5782.64,2549 cw(c5760.36,2522.94) 5794.65,2522.94 cw(c5828.93,2522.94) X1.2@5806.65,2549 ; C8.2@5798.44,2460.49 ccw(c5773.19,2469.98) 5796.55,2483.46 ccw(c5815.44,2494.37) C8.2@5815.67,2472.56 ; X1.2@5813.15,2541.4 ccw(c5847.5,2501.23) 5794.65,2501.23 ; C8.2 cw(c5867.1,2501.23) 5794.65,2501.23
TCKIN: J1.32 R4.1 U2.13 | length 1420
  Top Layer w12: v1@5870.76,2729.24 ccw(c5860.51,2739.49) 5875,2739.49 ccw(c5889.49,2739.49) v1@5879.24,2729.24 ; v1(5875,2725) 5875,2756.18 U2.13 cw(c5874.45,2664.06) 5939.98,2729.59 R4.1 ; U2.13@5903.89,2756.69 ccw(c5926.29,2769.62) 5919.6,2744.63 ; 5957.76,2711.8 ccw(c5994.57,2748.61) R4.1@5994.57,2696.56 ; 5967.27,2702.3 cw(c5943.91,2678.94) R4.1@5976.94,2678.94
  Bottom Layer w12: J1.32 5579.01,2915 cw(c5579.01,2815) 5649.72,2885.71 5781.14,2754.29 ccw(c5851.85,2825) 5851.85,2725 v1(5875,2725) ; J1.32@5109.09,2895.91 cw(c5155.18,2849.82) 5155.18,2915 cw(c5155.18,2980.18) J1.32@5109.09,2934.09 ; J1.32@5117.58,2887.42 cw(c5184.15,2820.85) 5184.15,2915 cw(c5184.15,3009.15) J1.32@5117.58,2942.58 ; v1@5870.76,2720.76 ccw(c5860.51,2710.51) 5860.51,2725 ccw(c5860.51,2739.49) v1@5870.76,2729.24
TCKOUT: R4.2 U2.15 U2.26 | length 947.4
  Top Layer w10: v1@5744.81,2915.19 5803.58,2973.96 U2.26
  Top Layer w12: U2.15 5931.1,2796.1 ; 5921.11,2796.1 ccw(c5921.11,2823.89) v1@5940.76,2804.24 ; v1@5939.33,2801.96 cw(c5931.1,2804.81) 5931.1,2796.1 ; v1(5945,2800) 5935,2800 5931.1,2796.1 ; R4.2 v1@6125,2675 ; R4.2@6077.89,2662.54 cw(c6107.98,2632.46) 6107.98,2675 cw(c6107.98,2717.54) R4.2@6077.89,2687.46 ; 6107.09,2675 ccw(c6107.09,2690.16) v1@6117.8,2679.44 ; 6108.04,2675 cw(c6108.04,2661.19) v1@6117.8,2670.95
  Bottom Layer w12: v1@5735,2914 cw(c5735,2899.51) 5745.24,2909.76 cw(c5755.49,2920) v1@5741,2920 ; v1(5735,2920) 5751.69,2903.3 ccw(c5822.41,2974.02) 5822.41,2874.02 5822.83,2874.02 cw(c5822.83,2793.22) 5879.96,2850.35 5919.93,2810.38 ccw(c5945,2835.45) v1(5945,2800) 5955.82,2800 cw(c5955.82,2700) 6026.53,2770.71 v1(6122.05,2675.2) ; v1@5939.8,2797 ccw(c5927.26,2789.76) 5931.01,2803.75 ccw(c5934.76,2817.74) v1@5942,2805.2 ; v1@5948.38,2795.04 cw(c5960.41,2777.4) 5964.38,2798.38 ; v1@6116.05,2675.2 ccw(c6101.56,2675.2) 6111.8,2685.44 ccw(c6122.05,2695.68) v1@6122.05,2681.2
TDIIN: R2.1 U2.18 | length 137.3
  Top Layer w12: U2.18 5964.41,2855.16 cw(c5964.41,2825) R2.1
TDIOUT: R2.2 U2.27 | length 735.2
  Top Layer w12: v1@5745,2956 ccw(c5745,2995.16) 5772.69,2967.47 ; v1@5750.11,2944.89 5782.84,2977.62 5782.84,3023.39 U2.27 ; R2.2 v1@6120,2825 ; R2.2@6077.89,2812.54 cw(c6107.98,2782.46) 6107.98,2825 cw(c6107.98,2867.54) R2.2@6077.89,2837.46 ; 6107.09,2825 cw(c6107.09,2809.84) v1@6117.8,2820.56 ; 6108.04,2825 ccw(c6108.04,2838.81) v1@6117.8,2829.05
  Bottom Layer w12: v1(5745,2950) ccw(c5800.13,3005.13) 5800.13,2927.17 5978.26,2927.17 cw(c5978.26,2827.17) 6048.97,2897.88 v1(6122.05,2824.8) ; v1@5746.55,2944.2 cw(c5750.3,2930.21) 5757.54,2942.76 cw(c5764.79,2955.3) v1@5750.8,2951.55 ; v1@6116.05,2824.8 ccw(c6101.56,2824.8) 6111.8,2835.05 ccw(c6122.05,2845.29) v1@6122.05,2830.8
TDOIN: R9.1 U2.16 U2.28 U2.30 | length 1113.4
  Top Layer w12: v1(5710,2960) 5724.84,2974.84 U2.30@5724.84,2992.17 ; v1@5710,2966 ccw(c5710,2980.49) 5720.24,2970.24 ccw(c5730.49,2960) v1@5716,2960 ; U2.30 U2.30@5724.84,2992.17 ; U2.28 5764.21,2991.23 cw(c5750,2991.23) 5750,2977.02 5740,2977.02 cw(c5740,2992.17) U2.30@5724.84,2992.17 ; v1@5816.93,2826.77 5827.91,2815.79 ; v1@5822.92,2828.51 ccw(c5839.98,2827.86) 5827.91,2815.79 ; U2.16 5827.91,2815.79 ; R9.1 v1@6115,3050 ; R9.1@6077.89,3037.54 cw(c6107.98,3007.46) 6107.98,3050 cw(c6107.98,3092.54) R9.1@6077.89,3062.46 ; 6105.66,3050 cw(c6105.66,3032.83) v1@6117.8,3044.97 ; 6109.46,3050 ccw(c6109.46,3061.8) v1@6117.8,3053.46
  Bottom Layer w12: v1@5705.76,2955.76 cw(c5695.51,2945.51) 5710,2945.51 cw(c5724.49,2945.51) v1@5714.24,2955.76 ; v1@5715.89,2958.87 cw(c5739.72,2954.28) 5726.11,2974.37 ; 5799.1,2831.03 ccw(c5803.07,2849.96) v1@5813.65,2833.76 ; v1(5816.93,2828.74) 5810,2828.74 cw(c5810,2928.74) 5710,2928.74 v1(5710,2960) 5720.71,2970.71 cw(c5791.42,2900) 5791.42,3000 6031.41,3000 ccw(c6031.41,3100) 6102.12,3029.29 v1(6122.05,3049.21) ; v1@6116.05,3049.21 cw(c6101.56,3049.21) 6111.8,3038.97 cw(c6122.05,3028.73) v1@6122.05,3043.21
TMSIN: J1.31 R3.1 U2.14 | length 1472.8
  Top Layer w12: U2.14 5930.79,2776.42 cw(c5930.79,2686.22) R3.1 ; 5935.6,2776.03 cw(c5933.96,2755.6) v1@5949.57,2768.89 ; v1@5942.78,2770.57 cw(c5949.05,2754.84) 5956.11,2770.23 ; v1@5947.22,2759.43 cw(c5963.38,2718.87) R3.1@5981.58,2758.55 ; 5955.84,2772.36 ccw(c5974.01,2803.83) R3.1@5987.85,2770.23 ; 5963.15,2768.14 cw(c5947.7,2741.38) R3.1@5977.55,2749.38
  Bottom Layer w12: J1.31 5514.44,3015 cw(c5514.44,2915) 5585.16,2985.71 5776.58,2794.29 ccw(c5847.29,2865) 5847.29,2765 v1(5945,2765) ; J1.31@5109.09,2995.91 cw(c5155.18,2949.82) 5155.18,3015 cw(c5155.18,3080.18) J1.31@5109.09,3034.09 ; J1.31@5117.58,2987.42 cw(c5184.15,2920.85) 5184.15,3015 cw(c5184.15,3109.15) J1.31@5117.58,3042.58 ; v1@5940.76,2760.76 ccw(c5930.51,2750.51) 5930.51,2765 ccw(c5930.51,2779.49) v1@5940.76,2769.24
TMSOUT: R3.2 U2.17 | length 493.8
  Top Layer w12: U2.17 5929.53,2835.47 v1(5934.76,2830.24) ; U2.17@5907.64,2835.47 cw(c5907.64,2803.11) v1@5930.52,2825.99 ; R3.2 v1@6120,2750 ; R3.2@6077.89,2737.54 cw(c6107.98,2707.46) 6107.98,2750 cw(c6107.98,2792.54) R3.2@6077.89,2762.46 ; v1@6117.8,2745.76 ccw(c6107.56,2735.51) 6107.56,2750 ccw(c6107.56,2764.49) v1@6117.8,2754.24
  Bottom Layer w12: v1(5934.76,2830.24) 6000.39,2830.24 cw(c6000.39,2730.24) 6071.1,2800.95 v1(6122.05,2750) ; v1@5939.01,2825.99 cw(c5949.25,2815.75) 5949.25,2830.24 cw(c5949.25,2844.72) v1@5939.01,2834.48 ; v1@6116.05,2750 ccw(c6101.56,2750) 6111.8,2760.24 ccw(c6122.05,2770.49) v1@6122.05,2756
TRESIN: R6.1 U2.12 | length 343.2
  Top Layer w6: U2.12 cw(c5823.31,2618.31) 5885,2680 5897.27,2667.73 ccw(c5967.98,2738.44) 5967.98,2638.44 6010,2638.44 cw(c6010,2597.42) 6038.99,2626.44 R6.1 ; U2.12@5825.02,2703.23 cw(c5829.27,2697.63) 5830.23,2704.6 ; U2.12@5825.58,2707.31 ccw(c5831.16,2711.53) 5830.2,2704.6 ; R6.1@6045.1,2607.36 ccw(c6023.57,2610.99) 6039.01,2626.42 ccw(c6050.77,2638.19) R6.1@6057.32,2622.89 ; R6.1@6045.28,2620.16 ccw(c6054.53,2629.41) R6.1@6059.68,2617.38
TRESOUT: R6.2 U2.11 | length 276.4
  Top Layer w12: U2.11 5803.58,2673.42 ccw(c5845,2673.42) 5845,2632 5896.58,2632 cw(c5896.58,2532) 5967.29,2602.71 5970,2600 ; R6.2@5977.87,2594.35 ccw(c5970,2591.69) 5970,2600 ; R6.2@5977.87,2605.65 cw(c5970,2608.31) 5970,2600 ; R6.2 5970,2600
TRSTIN: R1.1 U2.19 | length 337.2
  Top Layer w12: U2.19 5969.41,2874.84 ccw(c5969.41,2900) R1.1 ; U2.19@5900.79,2874.84 ccw(c5900.79,2989.84) R1.1@5982.11,2908.52 ; 5929.76,2874.84 ccw(c5929.76,2960.87) R1.1@5990.59,2900.04 ; 5958.73,2874.84 ccw(c5958.73,2931.9) R1.1@5999.08,2891.55
TRSTOUT: R1.2 U2.10 | length 890.9
  Top Layer w12: v1@5779.66,2652.47 ccw(c5769.41,2662.71) 5783.9,2662.71 ccw(c5798.38,2662.71) v1@5788.14,2652.47 ; v1(5783.9,2648.22) U2.10 ; R1.2 v1@6120,2900 ; R1.2@6077.89,2887.54 cw(c6107.98,2857.46) 6107.98,2900 cw(c6107.98,2942.54) R1.2@6077.89,2912.46 ; 6106.61,2900 cw(c6106.61,2884.17) v1@6117.8,2895.36 ; 6108.51,2900 ccw(c6108.51,2913.14) v1@6117.8,2903.85
  Bottom Layer w12: v1(5783.9,2648.22) 6110.82,2648.22 ccw(c6110.82,2700.79) 6163.39,2700.79 6163.39,2816.85 ccw(c6063.39,2816.85) 6134.1,2887.56 v1(6122.05,2899.61) ; v1@5788.14,2643.98 cw(c5798.38,2633.74) 5798.38,2648.22 cw(c5798.38,2662.71) v1@5788.14,2652.47 ; v1@6122.05,2893.61 cw(c6122.05,2879.12) 6132.29,2889.36 cw(c6142.53,2899.61) v1@6128.05,2899.61
USBDM: R7.1 U1.2 | length 356.1
  Top Layer w10: U1.2 5505.59,3379.32 ccw(c5605.59,3379.32) 5534.88,3308.61 5576.22,3267.28 ccw(c5630,3321.06) 5630,3245 cw(c5630,3194.62) 5665.62,3230.25 ; 5665.99,3229.87 ccw(c5691.06,3254.94) R7.1@5691.06,3219.49 ; R7.1@5672.91,3205 ccw(c5646.4,3211.03) 5665.62,3230.24 ; R7.1 5665.62,3230.25
USBDP: R5.1 R8.1 U1.3 | length 686.7
  Top Layer w10: U1.3@5478.43,3376.31 cw(c5473.27,3368.38) 5482.53,3370.34 ; U1.3 5480,3382.29 ccw(c5580,3382.29) 5509.29,3311.58 R8.1 5642.98,3177.88 ccw(c5675,3209.9) 5675,3164.62 5794.95,3164.62 ccw(c5794.95,3200.05) 5820,3175 ; 5581.49,3239.38 cw(c5542.98,3200.87) R8.1@5597.44,3200.87 ; 5590.99,3229.87 ccw(c5616.06,3254.94) R8.1@5616.06,3219.49 ; R8.1@5598.56,3222.31 cw(c5577.12,3200.87) R8.1@5607.44,3200.87 ; R8.1@5632.51,3201.83 ccw(c5670.38,3206.07) 5651.32,3173.07 ; R5.1@5823.81,3193.85 cw(c5807.7,3187.3) 5820,3175 ; R5.1@5839.67,3182.3 ccw(c5837.78,3157.22) 5820,3175 ; R5.1 cw(c5842.91,3200.87) 5844.39,3199.39 5820,3175
pads on no net: J1.4 J1.8 J1.9 J1.10 J1.11 J1.12 J1.13 J1.14 J1.15 J1.16 J1.17 J1.18 J1.19 J1.20 J1.21 J1.22 J1.23 J1.24 J1.25 J1.26 J1.27 J1.28 J1.29 J1.30 J1.33 J1.34 J1.35 J1.36 J1.37 J1.38 J1.39 J1.40 J1.41 J1.42 J1.43 J1.44 J1.45 J1.46 J1.47 J1.48 J1.49 J1.50 J1.51 J1.52 U1.0 U2.21 U2.22 U2.31 U2.34 U2.37 U2.38 U2.39 U2.40 U2.41 U2.42 U2.43 U2.45 U2.46

## Polygon pours and split planes (outlines as drawn)
GND on Top Layer "Keep-Out Layer-No Net" (solid, pour order 2): 4995.34,3581.71 6434.32,3581.71 6434.32,2146.67 4995.34,2146.67
GND on Bottom Layer "Keep-Out Layer-No Net" (solid, pour order 4): 4993.32,3581.57 6434.26,3581.57 6434.26,2144.56 4995.29,2144.56

## Other copper
Top Layer:
  rectangle net 3.3V: 5562.99,2718.5 5606.3,2755.91

## Text inside footprints (layer, text, board x,y; h text height)
J1: Bottom Overlay "NRST" at 6186.54,3149.33 h31.5; Bottom Overlay "PB8" at 6186.54,3048.94 h31.5; Bottom Overlay "PB9" at 6186.54,2948.54 h31.5; Bottom Overlay "PB1" at 6186.54,2848.15 h31.5; Bottom Overlay "PB0" at 6186.54,2747.76 h31.5; Bottom Overlay "PC5" at 6186.54,2647.36 h31.5; Bottom Overlay "PC4" at 6186.54,2546.97 h31.5; Bottom Overlay "PA0" at 5338.11,2556.81 h31.5; Bottom Overlay "PA1" at 5328.27,2657.2 h31.5; Bottom Overlay "PA2" at 5328.27,2755.63 h31.5; Bottom Overlay "PA3" at 5328.27,2856.02 h31.5; Bottom Overlay "PA8" at 5328.27,2956.42 h31.5; Bottom Overlay "PA9" at 5328.27,3058.78 h31.5; Bottom Overlay "PA10" at 5353.86,3155.24 h31.5; Bottom Overlay "BOOT0" at 5387.32,3206.42 h31.5; Bottom Overlay "PB2" at 5326.3,3106.02 h31.5; Bottom Overlay "PA13" at 5353.86,3005.63 h31.5; Bottom Overlay "PA14" at 5353.86,2905.24 h31.5; Bottom Overlay "PA15" at 5353.86,2804.84 h31.5; Bottom Overlay "PB3" at 5338.11,2708.39 h31.5; Bottom Overlay "PB4" at 5338.11,2607.99 h31.5; Bottom Overlay "PB5" at 5338.11,2507.6 h31.5; Bottom Overlay "PB12" at 5462.13,2444.61 h23.62; Bottom Overlay "PB11" at 5562.52,2444.61 h23.62; Bottom Overlay "PB10" at 5662.91,2444.61 h23.62; Bottom Overlay "PA4" at 5761.34,2446.57 h31.5; Bottom Overlay "PA7" at 5861.73,2446.57 h31.5; Bottom Overlay "PA6" at 5962.13,2446.57 h31.5; Bottom Overlay "PA5" at 6062.52,2446.57 h31.5; Bottom Overlay "PB6" at 5401.1,2395.39 h31.5; Bottom Overlay "PB7" at 5503.46,2395.39 h31.5; Bottom Overlay "PB13" at 5603.86,2397.36 h23.62; Bottom Overlay "PC0" at 5704.25,2395.39 h31.5; Bottom Overlay "PC1" at 5804.65,2395.39 h31.5; Bottom Overlay "PC2" at 5905.04,2395.39 h31.5; Bottom Overlay "PC3" at 6001.5,2395.39 h31.5; Bottom Overlay "PC13" at 6111.73,2399.33 h23.62; Bottom Overlay "PC6" at 6186.54,2497.76 h31.5; Bottom Overlay "PC7" at 6186.54,2598.15 h31.5; Bottom Overlay "PC8" at 6186.54,2698.54 h31.5; Bottom Overlay "PC9" at 6186.54,2798.94 h31.5; Bottom Overlay "PC10" at 6186.54,2897.36 h31.5; Bottom Overlay "PC11" at 6186.54,2997.76 h31.5; Bottom Overlay "PC12" at 6186.54,3100.12 h31.5; Bottom Overlay "PD2" at 6186.54,3200.51 h31.5; Bottom Overlay "GND" at 6059.57,3294.84 h31.5; Bottom Overlay "3V3" at 5954.57,3294.84 h31.5; Bottom Overlay "5V" at 5844.57,3294.84 h31.5; Bottom Overlay "AREF" at 5764.57,3294.84 h31.5; Bottom Layer "MAGI" at 6320,2270 h31.5